# Altium PCB Simple Watch Development Board.PcbDoc (part 2 of 2)
Units mil, origin at the board's own origin, x right, y up, seen from the top; angles counter-clockwise.
Board outline 3937.01 x 2559.06 mil, 4 copper layers (Top Layer, Signal Layer 1, Ground Plane, Bottom Layer), stack 40.634 mil thick; 125 components, 93 nets, 403 pads, 128 vias.
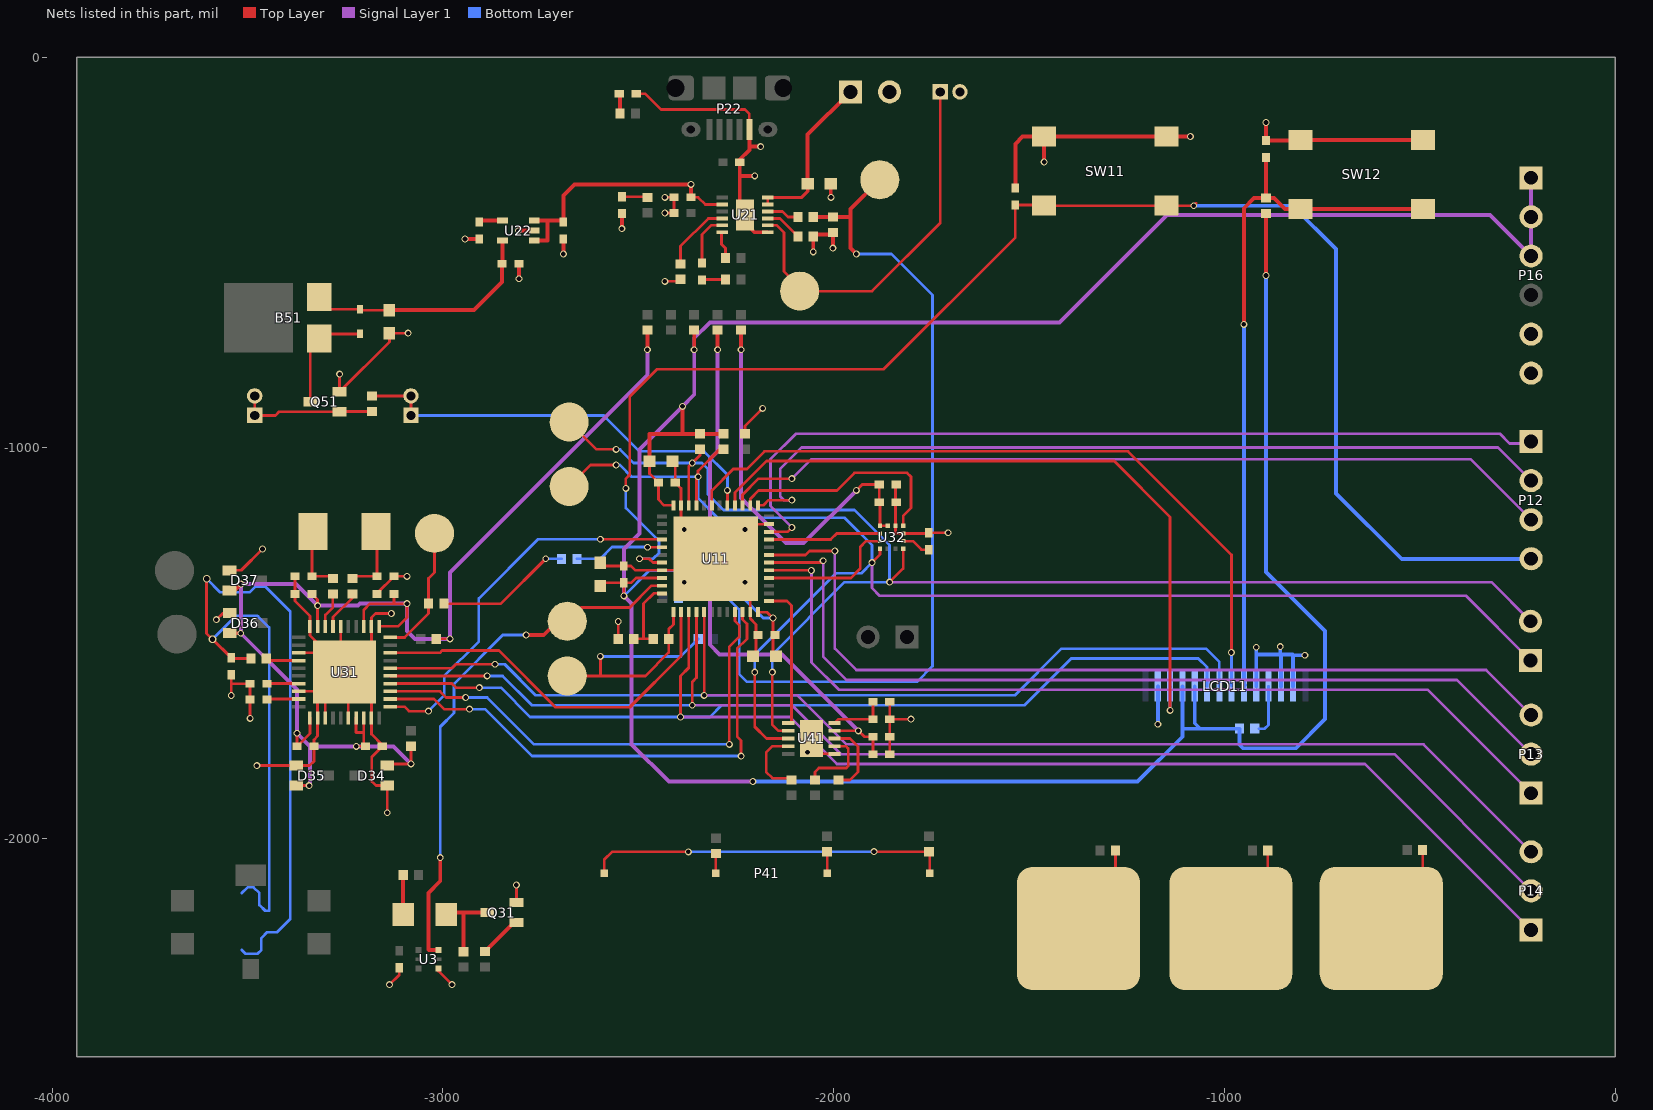
[diagram p4: the nets of this part, all layers, seen from the top]

## Via types
v1: diameter 17.72, hole 11.81, Top Layer to Bottom Layer, 122 vias
v2: diameter 196.85, hole 122.05, Top Layer to Bottom Layer, 4 vias
v3: diameter 19.68, hole 13.78, Top Layer to Bottom Layer, 2 vias

## Nets (pads, with @x,y where several pads share a name; then routed paths per layer and width w, separated by ;. In a path a pad name is that pad's centre, name@x,y a point inside that pad or via, vN(x,y) a via of type N, cw(c..) or ccw(c..) an arc to the next point about the centre after c; other vN are vias at no path point) (continued)
GND: C11.1 C12.1 C14.1 C15.1 C17.1 C18.1 C19.1 C20.2 C21.1 C22.1 C23.1 C24.1 C25.1 C26.1 C27.1 C31.1 C32.1 C33.1 C34.2 C35.1 C36.1 C37.1 C38.1 C39.1 C41.1 C42.1 C43.1 C44.1 C51.1 C310.1 C311.1 C312.1 C313.1 D24.2 D29.2 D34.1 D35.1 D36.1 D37.1 LCD11.2 LCD11.3 LCD11.5 LCD11.13 P16.5 P16.6 P21.2 P22.5 Q31.2 Q51.2 R14.1 R16.2 R21.1 R22.1 R26.2 RT21.2 SW11.3 SW11.4 SW12.1 SW12.2 U3.4 U11.8 U11.23 U11.35 U11.47 U11.49 U21.7 U21.13 U22.2 U31.3 U31.8 U31.12 U31.13 U31.16 U31.19 U31.32 U31.36 U31.40 U31.41 U32.6 U32.8 U41.1 U41.11 | length 7331.6
  Top Layer w7: v1(-3580,-1440) -3563.46,-1423.46 D36.1@-3545.75,-1423.46 ; D37.1@-3546.38,-1313.46 -3516.42,-1313.46 v1(-3462.01,-1259.06) ; v1(-3542.01,-1634.06) -3542.01,-1604.06 ; C39.1@-3542.01,-1580.71 -3542.01,-1604.06 ; v1(-3493.66,-1692.4) C37.1@-3493.66,-1644.06 C38.1@-3493.66,-1604.06 -3542.01,-1604.06 ; v1@-3477.01,-1814.06 v1(-3476.42,-1813.46) D35.1@-3375.75,-1813.46 -3341.42,-1813.46 -3330.35,-1802.4 C36.1@-3330.35,-1764.06 -3330.35,-1747.4 -3320.91,-1737.95 U31.12@-3320.91,-1691.18 -3320.91,-1642.95 U31.41@-3301.22,-1623.27 ; C34.2@-3378.66,-1329.06 C31.1@-3378.66,-1374.06 -3378.66,-1392.4 -3340.59,-1430.47 U31.40@-3340.59,-1456.93 -3340.59,-1480.47 U31.41@-3261.85,-1559.21 ; U31.8@-3369.13,-1623.27 U31.41@-3301.22,-1623.27 ; U31.3@-3369.13,-1524.84 -3301.22,-1524.84 -3261.85,-1564.21 U31.41@-3261.85,-1559.21 ; U31.13@-3301.22,-1691.18 U31.41@-3301.22,-1623.27 ; v1(-3264.61,-811.65) Q51.2@-3264.61,-856.61 -3137.01,-729.02 C51.1@-3137.01,-706.73 v1(-3089.33,-706.73) ; U31.36@-3261.85,-1456.93 U31.41@-3261.85,-1559.21 ; U31.16@-3242.17,-1691.18 U31.41@-3242.17,-1583.9 ; C32.1@-3168.66,-1374.06 -3168.66,-1372.36 C33.1@-3125.35,-1329.06 v1(-3092.01,-1329.06) ; v1(-3142.64,-1934.06) D34.1@-3142.64,-1864.65 -3171.42,-1864.65 -3182.01,-1854.06 -3182.01,-1790.71 C35.1@-3155.35,-1764.06 -3155.35,-1760.71 -3183.11,-1732.95 U31.19@-3183.11,-1691.18 -3183.11,-1642.95 U31.41@-3242.17,-1583.9 ; v1(-3137.01,-2374.06) -3112.01,-2349.06 C313.1@-3112.01,-2330.71 ; v1(-3132.01,-1424.06) -3172.92,-1424.06 -3183.11,-1434.25 U31.32@-3183.11,-1456.93 -3183.11,-1505.16 U31.41@-3252.01,-1574.06 ; U3.4@-3011.42,-2332.68 -3011.42,-2339.65 v1(-2977.01,-2374.06) ; Q31.2@-2812.01,-2164.06 v1(-2812.01,-2119.06) ; C18.1@-2597.01,-1294.53 -2589.13,-1302.4 C17.1@-2537.01,-1302.4 -2518.66,-1302.4 -2507.48,-1313.58 U11.8@-2438.82,-1313.58 -2331.54,-1313.58 U11.49@-2302.01,-1284.06 ; R14.1@-2551.38,-1489.06 v1(-2551.38,-1444.68) ; D29.2@-2505.35,-94.06 -2482.01,-94.06 -2442.01,-134.06 -2227.01,-134.06 -2215.83,-145.24 P22.5@-2215.83,-185.35 ; v1(-2432.01,-574.06) -2397.32,-574.06 R22.1@-2392.01,-568.74 ; v1(-2432.01,-399.06) C23.1@-2408.66,-399.06 C22.1@-2408.66,-359.06 v1(-2432.01,-359.06) ; C15.1@-2412.48,-1034.06 -2405.35,-1041.18 C12.1@-2405.35,-1089.06 -2390.59,-1103.82 U11.47@-2390.59,-1147.24 -2390.59,-1195.47 U11.49@-2302.01,-1284.06 ; R16.2@-2227.01,-964.37 -2227.01,-944.06 v1(-2182.01,-899.06) ; U11.23@-2213.43,-1420.87 -2213.43,-1372.64 U11.49@-2302.01,-1284.06 ; U11.23@-2212.01,-1429.06 -2213.43,-1427.64 -2213.43,-1437.64 -2198.66,-1452.4 -2198.66,-1526.18 C14.1@-2206.54,-1534.06 ; U11.35@-2165.2,-1195.47 -2213.43,-1195.47 v1(-2227.01,-1209.06) U11.49@-2302.01,-1284.06 ; U41.11@-2057.01,-1744.06 -2037.32,-1744.06 -2047.01,-1753.74 -2047.01,-1783.43 U41.1@-1997.95,-1783.43 ; C44.1@-1856.3,-1784.68 C43.1@-1856.3,-1739.68 C41.1@-1856.3,-1694.68 ; C42.1@-1856.3,-1649.68 C41.1@-1856.3,-1694.68 ; C311.1@-1840.04,-1094.06 -1841.85,-1095.87 U32.8@-1841.85,-1199.53 -1841.85,-1219.21 U32.6@-1822.17,-1219.21 -1758.5,-1219.21 C310.1@-1756.69,-1217.4 v1(-1707.01,-1217.4) v1@-1703.66,-1217.4 ; v1(-1802.01,-1694.68) C41.1@-1856.3,-1694.68 ; U31.41@-3301.22,-1623.27 U31.41@-3252.01,-1574.06 ; U31.41@-3261.85,-1559.21 -3252.01,-1569.06 U31.41@-3252.01,-1574.06 ; U31.41@-3252.01,-1574.06 U31.41@-3242.17,-1583.9
  Top Layer w10: v1(-2943.66,-465.71) C27.1@-2907.01,-465.71 C27.1@-2905.35,-464.06 ; v1(-2807.01,-444.06) U22.2@-2766.65,-444.06 ; v1(-2805.35,-567.4) C26.1@-2805.35,-529.06 ; v1(-2692.01,-504.06) C25.1@-2692.01,-465.71 ; v1(-2542.01,-439.06) D24.2@-2542.01,-400.71 ; P22.5@-2215.83,-185.35 -2215.83,-229.06 ; v1(-2202.01,-304.06) -2240.35,-304.06 ; v1(-2187.01,-229.06) -2215.83,-229.06 ; U21.7@-2168.94,-448.35 -2202.72,-448.35 -2227.01,-424.06 U21.13@-2227.01,-404.06 -2240.35,-390.71 -2240.35,-304.06 ; v1(-2052.32,-498.74) R21.1@-2052.32,-459.06 -2047.32,-454.06 -2007.32,-454.06 R26.2@-2002.01,-448.74 v1(-2002.01,-489.06) ; v1(-2007.01,-359.06) -2007.48,-358.58 C24.1@-2007.48,-324.06 C24.1@-2007.01,-324.53 ; C19.1@-1535,-335.24 -1535,-221.97 -1516.34,-203.31 SW11.4@-1461.5,-203.31 ; v1(-1461.5,-268.54) SW11.4@-1461.5,-203.31 ; v1@-1082.76,-203.31 v1(-1087.01,-203.31) SW11.3@-1148.5,-203.31 SW11.4@-1461.5,-203.31 ; v1(-893.5,-167.56) C20.2@-893.5,-213.82 -806.93,-213.82 SW12.1@-805,-211.89 SW12.2@-492.01,-211.89 ; -2240.35,-304.06 C21.1@-2240.35,-269.06 -2240.35,-262.4 -2215.83,-237.87 -2215.83,-229.06
  Bottom Layer w10: v1(-1170.47,-1707.52) LCD11.13@-1170.47,-1610.47 ; LCD11.5@-918.5,-1610.47 -918.5,-1530.55 ; v1(-918.5,-1510.55) -918.5,-1530.55 ; v1(-857.01,-1509.06) -857.01,-1529.06 ; LCD11.3@-855.51,-1610.47 -855.51,-1530.55 -857.01,-1529.06 ; LCD11.2@-824.02,-1610.47 -824.02,-1531.06 ; v1(-794.02,-1531.06) -824.02,-1531.06 ; -918.5,-1530.55 -917.01,-1529.06 -857.01,-1529.06 ; -857.01,-1529.06 -826.02,-1529.06 -824.02,-1531.06
  other v1: -2067.01,-1779.06 -2382.01,-1344.06 -2227.01,-1344.06 -2382.01,-1209.06
I2C1_SCL: P11.1 R19.2 TP14.1 U11.45 U32.1 U41.8 | length 3689.5
  Top Layer w7: TP14.1@-2677.01,-1099.06 -2622.01,-1044.06 v1(-2557.01,-1044.06) ; U11.45@-2351.22,-1147.24 -2351.22,-1078.27 v1(-2347.01,-1074.06) -2347.01,-1059.06 -2291.69,-1003.74 R19.2@-2282.01,-1003.74 ; v1(-2202.01,-1574.06) -2202.01,-1714.06 -2172.01,-1744.06 U41.8@-2116.06,-1744.06 ; v1(-1902.01,-1294.06) -1881.22,-1273.27 U32.1@-1881.22,-1258.58
  Signal Layer 1 w7: v1(-1902.01,-1294.06) -1902.01,-1359.06 -1882.32,-1378.74 -382.01,-1378.74 P11.1@-216.69,-1544.06
  Bottom Layer w7: v1(-2557.01,-1044.06) -2547.01,-1044.06 -2517.01,-1074.06 v1(-2347.01,-1074.06) -2347.01,-1129.06 -2297.01,-1179.06 -1972.01,-1179.06 -1902.01,-1249.06 v1(-1902.01,-1294.06) -1929.11,-1321.16 -1994.11,-1321.16 -2202.01,-1529.06 v1(-2202.01,-1574.06)
I2C1_SDA: P11.2 R110.2 TP13.1 U11.46 U32.4 U41.7 | length 3624.6
  Top Layer w7: TP13.1@-2677.01,-934.06 -2607.01,-1004.06 v1(-2557.01,-1004.06) ; U11.46@-2370.91,-1147.24 -2370.91,-1047.95 v1(-2362.01,-1039.06) -2342.01,-1019.06 R110.2@-2342.01,-1003.74 ; v1(-2157.01,-1574.06) -2157.01,-1709.06 -2141.69,-1724.37 U41.7@-2116.06,-1724.37 ; v1(-1857.01,-1344.06) -1822.17,-1309.21 U32.4@-1822.17,-1258.58
  Signal Layer 1 w7: v1(-1857.01,-1344.06) -316.69,-1344.06 P11.2@-216.69,-1444.06
  Bottom Layer w7: v1(-2557.01,-1004.06) -2547.01,-1004.06 -2512.01,-1039.06 v1(-2362.01,-1039.06) -2337.01,-1039.06 -2322.01,-1054.06 -2322.01,-1119.06 -2282.01,-1159.06 -1947.01,-1159.06 -1857.01,-1249.06 v1(-1857.01,-1344.06) -1972.01,-1344.06 -2157.01,-1529.06 v1(-2157.01,-1574.06)
INT1_ACC: U11.28 U32.12 | length 355.3
  Top Layer w7: U11.28@-2165.2,-1333.27 -1956.22,-1333.27 -1932.01,-1309.06 -1932.01,-1254.06 -1916.85,-1238.9 U32.12@-1881.22,-1238.9
INT2_ACC: U11.33 U32.11 | length 290.5
  Top Layer w7: U11.33@-2165.2,-1234.84 -2007.8,-1234.84 -1992.17,-1219.21 U32.11@-1881.22,-1219.21
LCD_CS: LCD11.12 U11.40 | length 1798.3
  Top Layer w7: U11.40@-2252.8,-1147.24 -2252.8,-1114.84 -2172.01,-1034.06 -1282.01,-1034.06 -1138.98,-1177.09 v1(-1138.98,-1672.09)
  Bottom Layer w7: v1(-1138.98,-1672.09) LCD11.12@-1138.98,-1610.47 LCD11.12@-1137.01,-1612.44
LCD_CTRL: LCD11.7 U11.43 | length 1855.9
  Top Layer w7: U11.43@-2311.85,-1147.24 -2311.85,-1108.9 -2257.01,-1054.06 -2222.01,-1054.06 -2177.01,-1009.06 -1247.01,-1009.06 -982.01,-1274.06 v1(-982.01,-1524.06)
  Bottom Layer w7: v1(-982.01,-1524.06) -982.01,-1609.96 LCD11.7@-981.5,-1610.47
LED_DRV_SUP: C31.2 C32.2 C35.2 C36.2 D34.2 D35.2 D36.2 D37.2 R36.2 R38.2 R212.2 U31.11 U31.17 U31.18 U31.31 U31.33 U31.39 | length 3408.6
  Top Layer w7: D35.2@-3375.75,-1864.65 v1(-3342.6,-1864.65) ; v1(-3373.66,-1730.71) C36.2@-3373.66,-1764.06 -3340.59,-1730.98 U31.11@-3340.59,-1691.18 ; C31.2@-3335.35,-1374.06 -3320.91,-1388.5 v1(-3320.91,-1404.06) U31.39@-3320.91,-1456.93 ; U31.17@-3222.48,-1691.18 -3222.48,-1728.58 -3202.8,-1728.58 U31.18@-3202.8,-1691.18 ; v1(-3222.01,-1764.06) C35.2@-3198.66,-1764.06 -3202.8,-1759.92 -3202.8,-1729.06 ; U31.33@-3202.8,-1456.93 -3202.8,-1414.84 -3187.01,-1399.06 -3125.35,-1399.06 ; U31.31@-3163.43,-1456.93 -3114.88,-1456.93 -3092.01,-1434.06 v1(-3092.01,-1399.06) -3125.35,-1399.06 ; D34.2@-3142.64,-1813.46 -3138.23,-1809.06 v1(-3082.01,-1809.06) R38.2@-3082.01,-1763.74 ; C32.2@-3125.35,-1374.06 -3125.35,-1399.06 ; R36.2@-3017.32,-1489.06 v1(-2982.01,-1489.06)
  Top Layer w10: D37.2@-3546.38,-1364.65 -3532.6,-1364.65 v1(-3517.01,-1349.06) ; D36.2@-3545.75,-1474.65 v1(-3517.6,-1474.65) ; v1(-2477.01,-749.06) R212.2@-2477.01,-698.74
  Signal Layer 1 w10: v1(-3342.6,-1864.65) -3340.32,-1862.36 -3340.32,-1764.06 ; v1(-3082.01,-1809.06) -3127.01,-1764.06 v1(-3222.01,-1764.06) -3340.32,-1764.06 ; v1(-2477.01,-749.06) -2477.01,-814.06 -2982.01,-1319.06 v1(-2982.01,-1489.06) -3072.01,-1489.06 -3092.01,-1469.06 v1(-3092.01,-1399.06) -3212.01,-1399.06 -3217.01,-1404.06 v1(-3320.91,-1404.06) -3375.91,-1349.06 v1(-3517.01,-1349.06) -3517.01,-1474.06 v1(-3517.6,-1474.65) -3373.66,-1618.58 v1(-3373.66,-1730.71) -3340.32,-1764.06
LSM303_SUP: C311.2 C312.2 R213.2 U32.9 U32.10 | length 1019.8
  Top Layer w7: v1(-1942.01,-1109.06) -1927.01,-1094.06 C311.2@-1883.35,-1094.06 C312.2@-1883.35,-1139.06 -1881.22,-1141.18 U32.10@-1881.22,-1199.53 U32.9@-1861.54,-1199.53
  Top Layer w10: v1(-2237.01,-749.06) R213.2@-2237.01,-698.74
  Signal Layer 1 w10: v1(-2237.01,-749.06) -2237.01,-1129.06 -2122.01,-1244.06 -2077.01,-1244.06 v1(-1942.01,-1109.06)
MCU_SUP: C11.2 C12.2 C14.2 C15.2 C17.2 C18.2 LCD11.10 LCD11.11 P16.1 P16.2 P16.3 R17.2 R18.2 R19.1 R110.1 R215.2 U11.9 U11.24 U11.48 | length 8511
  Top Layer w7: C18.2@-2597.01,-1353.58 -2589.13,-1345.71 C17.2@-2537.01,-1345.71 ; v1(-2537.01,-1379.06) C17.2@-2537.01,-1345.71 ; C15.2@-2471.54,-1034.06 -2471.54,-1066.18 C12.2@-2448.66,-1089.06 -2448.66,-1132.4 -2433.82,-1147.24 U11.48@-2410.28,-1147.24 ; U11.9@-2438.82,-1333.27 -2506.22,-1333.27 -2518.66,-1345.71 C17.2@-2537.01,-1345.71 ; U11.24@-2193.74,-1420.87 -2170.2,-1420.87 v1(-2155.35,-1435.71) -2155.35,-1531.93 C14.2@-2157.48,-1534.06
  Top Layer w10: C15.2@-2471.54,-1034.06 -2471.54,-964.37 -2387.01,-964.37 ; v1(-2387.01,-894.06) -2387.01,-964.37 ; v1(-2357.01,-749.06) R215.2@-2357.01,-698.74 ; R19.1@-2282.01,-964.37 R110.1@-2342.01,-964.37 -2387.01,-964.37 ; v1(-893.5,-559.06) R17.2@-893.5,-400.16
  Signal Layer 1 w10: v1(-2207.01,-1854.06) -2422.01,-1854.06 -2517.01,-1759.06 -2517.01,-1399.06 v1(-2537.01,-1379.06) -2537.01,-1259.06 -2497.01,-1219.06 -2497.01,-1004.06 v1(-2387.01,-894.06) -2357.01,-864.06 v1(-2357.01,-749.06) -2357.01,-719.06 -2317.01,-679.06 -1422.01,-679.06 -1147.01,-404.06 -320,-404.06 P16.3@-215,-509.06 P16.2@-215,-409.06 P16.1@-215,-309.06
  Bottom Layer w7: v1(-2537.01,-1379.06) -2472.01,-1314.06 -2302.01,-1314.06 -2180.35,-1435.71 v1(-2155.35,-1435.71)
  Bottom Layer w10: v1(-2207.01,-1854.06) -1222.01,-1854.06 -1107.48,-1739.53 -1107.48,-1719.06 ; LCD11.11@-1107.48,-1610.47 -1107.48,-1719.06 ; LCD11.10@-1075.98,-1610.47 -1075.98,-1705.08 -1062.01,-1719.06 ; v1(-893.5,-559.06) -893.5,-1317.56 -742.01,-1469.06 -742.01,-1694.06 -817.01,-1769.06 -952.01,-1769.06 -961.69,-1759.37 R18.2@-961.69,-1719.06 -1062.01,-1719.06 ; -1107.48,-1719.06 -1062.01,-1719.06
MOTOR: P52.1 P52.2 R51.2 U11.41 | length 1100.8
  Top Layer w7: R51.2@-3182.01,-867.52 -3082.32,-867.52 -3082.01,-867.83 P52.1@-3082.01,-917.2 ; U11.41@-2272.48,-1147.24 -2272.01,-1146.77 v1(-2272.01,-1109.06)
  Bottom Layer w7: P52.1@-3082.01,-917.2 -2588.86,-917.2 -2497.01,-1009.06 -2332.01,-1009.06 -2272.01,-1069.06 v1(-2272.01,-1109.06)
MOTOR_GATE: P51.1 P51.2 Q51.1 R51.1 | length 354.3
  Top Layer w7: P51.2@-3482.01,-867.2 P51.1@-3482.01,-917.2 -3428.86,-917.2 -3419.45,-907.8 Q51.1@-3264.61,-907.8 -3263.7,-906.89 R51.1@-3182.01,-906.89
MOTOR_SUP: B51.1 C26.2 C51.2 D51.2 U22.5 | length 618.7
  Top Layer w7: B51.1@-3317.01,-614.06 -3285.35,-645.71 D51.2@-3212.01,-645.71 -3210.04,-647.68 C51.2@-3137.01,-647.68
  Top Layer w10: C51.2@-3137.01,-647.68 -2920.63,-647.68 -2848.66,-575.71 C26.2@-2848.66,-529.06 -2847.36,-527.76 U22.5@-2847.36,-469.65
NetB51_2: B51.2 D51.1 Q51.3 | length 281
  Top Layer w7: Q51.3@-3339.41,-882.2 -3339.41,-742.76 B51.2@-3317.01,-720.35 -3305.35,-708.7 D51.1@-3212.01,-708.7
NetC20_1: C20.1 LCD11.6 R17.1 SW12.3 SW12.4 | length 1811.9
  Top Layer w10: v1(-950,-684.06) -950,-387.05 -923.74,-360.79 R17.1@-893.5,-360.79 ; C20.1@-893.5,-257.13 R17.1@-893.5,-360.79 ; SW12.4@-492.01,-389.06 SW12.3@-805,-389.06 -844.92,-389.06 -873.19,-360.79 R17.1@-893.5,-360.79
  Bottom Layer w10: v1(-950,-684.06) LCD11.6@-950,-1610.47 LCD11.6@-947.01,-1607.48
NetC24_2: C24.2 P21.1 U21.11 U21.12 | length 426.7
  Top Layer w7: U21.11@-2168.94,-377.48 U21.12@-2168.94,-359.76
  Top Layer w8: U21.12@-2168.94,-359.76 -2082.72,-359.76 -2066.54,-343.58 C24.2@-2066.54,-324.06
  Top Layer w10: C24.2@-2066.54,-324.06 -2066.54,-198.58 P21.1@-1957.01,-89.06
NetC27_2: C27.2 U22.4 | length 61.3
  Top Layer w10: C27.2@-2907.01,-422.4 -2903.07,-418.46 U22.4@-2847.36,-418.46
NetC33_2: C33.2 R35.2 Y1.2 | length 181.8
  Top Layer w7: R35.2@-3232.01,-1334.68 -3226.38,-1329.06 C33.2@-3168.66,-1329.06 -3168.66,-1216.69 Y1.2@-3171.3,-1214.06
NetC34_1: C34.1 R34.2 Y1.1 | length 171.8
  Top Layer w7: Y1.1@-3332.72,-1214.06 -3335.35,-1216.69 C34.1@-3335.35,-1329.06 -3287.64,-1329.06 R34.2@-3282.01,-1334.68
NetC37_2: C37.2 U31.9 | length 81.7
  Top Layer w7: C37.2@-3450.35,-1644.06 -3449.25,-1642.95 U31.9@-3369.13,-1642.95
NetC38_2: C38.2 U31.7 | length 81.4
  Top Layer w7: C38.2@-3450.35,-1604.06 -3449.88,-1603.58 U31.7@-3369.13,-1603.58
NetC39_2: C39.2 R31.1 | length 2536.5
  Top Layer w7: v3(-3605,-1335) -3605,-1475 v3(-3590,-1490) -3589.41,-1490 C39.2@-3542.01,-1537.4 -3540.35,-1539.06 R31.1@-3491.69,-1539.06
  Bottom Layer w7: v3(-3605,-1335) -3570,-1370 -3495,-1370 -3480,-1355 -3455,-1355 -3391.02,-1418.98 -3391.02,-2206.02 -3425,-2240 -3450,-2240 -3465,-2255 -3465,-2285 -3475,-2295 -3505,-2295 -3515,-2285 ; v3(-3590,-1490) -3530,-1430 -3475.61,-1430 -3474.2,-1431.41 -3473.59,-1431.41 -3445,-1460 -3445,-2185 -3455,-2185 -3470,-2170 -3470,-2140 -3485,-2125 -3500,-2125 -3515,-2140
NetC41_2: C41.2 C42.2 U41.5 | length 147.5
  Top Layer w7: U41.5@-1997.95,-1704.68 -1987.95,-1694.68 C41.2@-1899.61,-1694.68 C42.2@-1899.61,-1649.68
NetC310_2: C310.2 U32.5 | length 74.5
  Top Layer w7: U32.5@-1822.17,-1238.9 -1797.17,-1238.9 -1775.35,-1260.71 C310.2@-1756.69,-1260.71
NetD21_1: D21.1 R24.2 | length 61
  Top Layer w7: D21.1@-2337.01,-570.71 -2335.35,-569.06 R24.2@-2276.69,-569.06
NetD21_2: D21.2 U21.5 | length 135
  Top Layer w7: D21.2@-2337.01,-527.4 -2337.01,-454.06 -2313.58,-430.63 U21.5@-2285.08,-430.63
NetD24_1: D24.1 R29.2 | length 65.8
  Top Layer w7: D24.1@-2542.01,-357.4 -2478.98,-357.4 R29.2@-2477.01,-359.37
NetD29_1: D29.1 R210.2 | length 50.8
  Top Layer w10: D29.1@-2548.66,-94.06 -2546.69,-96.02 R210.2@-2546.69,-144.06
NetD38_1: D38.1 R39.1 | length 100.2
  Top Layer w10: D38.1@-3102.13,-2194.06 -3102.13,-2094.49 R39.1@-3101.69,-2094.06
NetD38_2: D38.2 Q31.3 R311.2 | length 206.9
  Top Layer w10: D38.2@-2991.89,-2194.06 -2987.48,-2189.65 -2947.01,-2189.65 ; R311.2@-2947.01,-2289.68 -2947.01,-2189.65 ; Q31.3@-2886.81,-2189.65 -2947.01,-2189.65
NetLCD11_4: LCD11.4 R18.1 | length 128
  Bottom Layer w7: R18.1@-912.32,-1719.06 -897.01,-1719.06 -887.01,-1709.06 LCD11.4@-887.01,-1610.47
NetP41_1: P41.1 R45.2 | length 930.3
  Top Layer w7: P41.1@-2587.44,-2089.06 -2587.44,-2054.49 -2567.01,-2034.06 v1(-2372.01,-2034.06) ; v1(-1896.69,-2033.74) R45.2@-1756.58,-2033.74 -1754.27,-2036.05 P41.1@-1754.27,-2089.06
  Bottom Layer w7: v1(-2372.01,-2034.06) -2371.69,-2033.74 v1(-1896.69,-2033.74)
NetP41_2: P41.2 R46.2 | length 50.5
  Top Layer w7: P41.2@-2302.01,-2089.06 -2302.01,-2039.17 R46.2@-2301.58,-2038.74
NetP41_3: P41.3 R47.2 | length 55.3
  Top Layer w7: P41.3@-2016.58,-2089.06 R47.2@-2016.58,-2033.74
NetP42_1: P42.1 R48.2 | length 245.3
  Top Layer w7: P42.1@-598.5,-2230.47 -492.64,-2124.61 R48.2@-492.64,-2029.06
NetP43_1: P43.1 R49.2 | length 239.5
  Top Layer w7: P43.1@-983.5,-2230.47 -888.82,-2135.79 R49.2@-888.82,-2030.16
NetP44_1: P44.1 R50.2 | length 239.5
  Top Layer w7: P44.1@-1373.5,-2230.47 -1278.82,-2135.79 R50.2@-1278.82,-2030.16
NetQ31_1: Q31.1 R310.2 | length 110.7
  Top Layer w10: R310.2@-2892.01,-2289.37 -2817.87,-2215.24 Q31.1@-2812.01,-2215.24
NetR11_1: R11.1 R37.1 | length 348.6
  Top Layer w7: R37.1@-2997.64,-1399.06 -2852.01,-1399.06 v1(-2737.01,-1284.06)
  Bottom Layer w7: v1(-2737.01,-1284.06) R11.1@-2696.69,-1284.06
NetR11_2: R11.2 U11.5 | length 231.1
  Top Layer w7: v1(-2476.54,-1254.53) U11.5@-2438.82,-1254.53
  Bottom Layer w7: R11.2@-2657.32,-1284.06 -2597.01,-1284.06 -2567.01,-1254.06 -2477.01,-1254.06 v1(-2476.54,-1254.53)
NetR12_1: R12.1 R25.2 R26.1 TP21.1 | length 2363.8
  Top Layer w10: R25.2@-2052.32,-409.06 -2052.01,-409.37 R26.1@-2002.01,-409.37 -1957.01,-409.37 ; v1(-1942.01,-504.06) -1957.01,-489.06 -1957.01,-409.37 ; TP21.1@-1882.01,-314.06 -1957.01,-389.06 -1957.01,-409.37
  Bottom Layer w7: R12.1@-2397.32,-1384.06 -2272.01,-1384.06 -2242.01,-1414.06 -2242.01,-1579.06 -2222.01,-1599.06 -1787.01,-1599.06 -1747.01,-1559.06 -1747.01,-609.06 -1852.01,-504.06 v1(-1942.01,-504.06)
NetR21_2: R21.2 U21.9 | length 96.4
  Top Layer w7: U21.9@-2168.94,-412.91 -2137.83,-412.91 R21.2@-2091.69,-459.06
NetR22_2: R22.2 U21.4 | length 181.7
  Top Layer w7: R22.2@-2392.01,-529.37 -2392.01,-484.06 -2320.87,-412.91 U21.4@-2285.08,-412.91
NetR23_2: R23.2 U21.6 | length 70.8
  Top Layer w7: U21.6@-2285.08,-448.35 -2287.01,-450.28 -2287.01,-479.06 -2276.69,-489.37 R23.2@-2276.69,-514.06
NetR25_1: R25.1 U21.10 | length 83
  Top Layer w7: U21.10@-2168.94,-395.2 -2130.87,-395.2 -2117.01,-409.06 R25.1@-2091.69,-409.06
NetR31_2: R31.2 U31.4 | length 85.5
  Top Layer w7: R31.2@-3452.32,-1539.06 -3446.85,-1544.53 U31.4@-3369.13,-1544.53
NetR34_1: R34.1 U31.38 | length 90.8
  Top Layer w7: U31.38@-3301.22,-1456.93 -3301.22,-1428.27 -3282.01,-1409.06 R34.1@-3282.01,-1374.06
NetR35_1: R35.1 U31.37 | length 103.4
  Top Layer w7: U31.37@-3281.54,-1456.93 -3281.54,-1433.58 -3232.01,-1384.06 R35.1@-3232.01,-1374.06
NetR37_2: R37.2 TP35.1 U31.30 | length 334.7
  Top Layer w7: U31.30@-3134.88,-1485.47 -3098.11,-1485.47 -3037.01,-1424.37 R37.2@-3037.01,-1399.06 -3037.01,-1334.06 -3022.01,-1319.06 TP35.1@-3022.01,-1219.06
NetR41_1: R41.1 U41.9 | length 184.2
  Top Layer w7: U41.9@-2116.06,-1763.74 -2157.01,-1763.74 -2172.95,-1779.68 -2172.95,-1829.68 -2157.01,-1845.63 R41.1@-2108.9,-1845.63
NetR42_1: R42.1 U41.3 | length 192
  Top Layer w7: U41.3@-1997.95,-1744.06 -1958.58,-1744.06 -1937.95,-1764.68 -1937.95,-1829.68 -1958.27,-1850 R42.1@-1987.95,-1850
NetR43_1: R43.1 U41.2 | length 194
  Top Layer w7: R43.1@-2047.95,-1850 -2047.95,-1829.68 -2037.95,-1819.68 -1967.95,-1819.68 -1962.95,-1814.68 -1962.95,-1769.68 -1968.9,-1763.74 U41.2@-1997.95,-1763.74
NetRT21_1: RT21.1 TP22.1 U21.8 | length 983.6
  Top Layer w7: U21.8@-2168.94,-430.63 -2145.43,-430.63 -2127.01,-449.06 -2127.01,-549.06 -2112.01,-564.06 -2112.01,-574.06 TP22.1@-2087.01,-599.06 -1902.01,-599.06 -1727.01,-424.06 RT21.1@-1727.01,-89.06
NetU11_4: U11.4 U31.21 | length 977.1
  Top Layer w7: U31.21@-3134.88,-1662.64 -3098.43,-1662.64 -3087.01,-1674.06 v1(-3037.01,-1674.06) ; v1(-2597.01,-1234.06) -2439.61,-1234.06 U11.4@-2438.82,-1234.84
  Bottom Layer w7: v1(-3037.01,-1674.06) -2997.01,-1634.06 -2997.01,-1584.06 -2908.26,-1495.31 -2908.26,-1385.31 -2757.01,-1234.06 v1(-2597.01,-1234.06)
NetU11_14: U11.14 U31.28 | length 973
  Top Layer w7: U31.28@-3134.88,-1524.84 -3007.8,-1524.84 -3002.01,-1519.06 -2857.01,-1519.06 -2712.01,-1664.06 -2522.01,-1664.06 -2390.59,-1532.64 U11.14@-2390.59,-1420.87
NetU11_21: U11.21 U31.23 | length 1277.1
  Top Layer w7: U31.23@-3134.88,-1623.27 -3007.8,-1623.27 -2992.01,-1639.06 v1(-2942.01,-1639.06) ; v1(-2267.01,-1759.06) -2267.01,-1509.06 -2242.01,-1484.06 -2242.01,-1454.06 -2252.8,-1443.27 U11.21@-2252.8,-1420.87
  Bottom Layer w7: v1(-2942.01,-1639.06) -2887.01,-1639.06 -2767.01,-1759.06 v1(-2267.01,-1759.06)
NetU11_22: U11.22 U31.22 | length 1345.7
  Top Layer w7: U31.22@-3134.88,-1642.95 -3023.11,-1642.95 -2997.01,-1669.06 v1(-2932.01,-1669.06) ; v1(-2237.01,-1789.06) -2237.01,-1749.06 -2247.01,-1739.06 -2247.01,-1514.06 -2222.01,-1489.06 -2222.01,-1450.54 -2233.11,-1439.44 U11.22@-2233.11,-1420.87
  Bottom Layer w7: v1(-2932.01,-1669.06) -2892.01,-1669.06 -2772.01,-1789.06 v1(-2237.01,-1789.06)
NetU11_38: U11.38 U32.7 | length 593.7
  Top Layer w7: U11.38@-2213.43,-1147.24 -2213.43,-1130.47 -2192.01,-1109.06 -1992.01,-1109.06 -1947.01,-1064.06 -1812.01,-1064.06 -1802.01,-1074.06 -1802.01,-1154.06 -1822.17,-1174.21 U32.7@-1822.17,-1199.53
NRST: C19.2 P12.4 SW11.1 SW11.2 U11.7 | length 3874.6
  Top Layer w7: v1(-2532.01,-1104.06) -2532.01,-1079.06 -2522.01,-1069.06 -2522.01,-869.06 -2452.01,-799.06 -1872.01,-799.06 -1535,-462.05 C19.2@-1535,-378.54 -1463.43,-378.54 SW11.2@-1461.5,-380.47 SW11.1@-1148.5,-380.47 v1(-1078.43,-380.47) -1072.01,-374.06 ; v1(-2497.01,-1284.06) -2472.01,-1284.06 -2462.17,-1293.9 U11.7@-2438.82,-1293.9
  Bottom Layer w7: v1(-2532.01,-1104.06) -2532.01,-1154.06 -2447.01,-1239.06 -2447.01,-1269.06 -2462.01,-1284.06 v1(-2497.01,-1284.06)
  Bottom Layer w10: v1(-1078.43,-380.47) -825.59,-380.47 -714.51,-491.56 -714.51,-1116.56 -546.06,-1285 -237.64,-1285 P12.4@-216.69,-1264.06
OPAMP1_VINM: R13.1 R14.2 U11.11 | length 199.4
  Top Layer w7: R14.2@-2512.01,-1489.06 -2486.85,-1489.06 ; R13.1@-2461.69,-1489.06 -2486.85,-1489.06 ; U11.11@-2438.82,-1372.64 -2460.59,-1372.64 -2486.85,-1398.9 -2486.85,-1489.06
OPAMP1_VINP: TP37.1 U3.6 U11.10 | length 1370.3
  Top Layer w7: TP37.1@-2682.01,-1444.06 -2647.01,-1409.06 -2522.01,-1409.06 -2465.91,-1352.95 U11.10@-2438.82,-1352.95
  Top Layer w10: U3.6@-3011.42,-2285.43 -3035.63,-2285.43 -3037.01,-2284.06 -3037.01,-2139.06 -3007.01,-2109.06 v1(-3007.01,-2049.06) ; v1(-2787.01,-1479.06) -2742.01,-1479.06 -2707.01,-1444.06 TP37.1@-2682.01,-1444.06
  Bottom Layer w7: v1(-3007.01,-2049.06) -3007.01,-1714.06 -2972.01,-1679.06 -2972.01,-1604.06 -2847.01,-1479.06 v1(-2787.01,-1479.06)
OPAMP1_VOUT: R13.2 R15.2 TP11.1 U11.13 | length 716.9
  Top Layer w7: TP11.1@-2682.01,-1584.06 -2597.01,-1584.06 ; v1(-2597.01,-1534.06) -2597.01,-1584.06 ; U11.13@-2410.28,-1420.87 -2410.28,-1452.32 -2422.32,-1464.37 R13.2@-2422.32,-1489.06 -2422.32,-1524.37 -2482.01,-1584.06 -2597.01,-1584.06
  Bottom Layer w7: v1@-2602.01,-1534.06 v1(-2597.01,-1534.06) -2391.69,-1534.06 R15.2@-2346.69,-1489.06
SPI1_MISO: P14.2 U11.16 U31.25 | length 3390.6
  Top Layer w7: U31.25@-3134.72,-1584.06 U31.25@-3134.88,-1583.9 v1(-2887.17,-1583.9) ; v1(-2362.01,-1659.06) -2362.01,-1599.06 -2351.22,-1588.27 U11.16@-2351.22,-1420.87
  Signal Layer 1 w7: v1(-2362.01,-1659.06) -2107.01,-1659.06 -1982.01,-1784.06 -565,-1784.06 P14.2@-215,-2134.06
  Bottom Layer w7: v1(-2887.17,-1583.9) -2847.17,-1583.9 -2772.01,-1659.06 v1(-2362.01,-1659.06)
SPI1_MOSI: LCD11.8 P14.3 U11.17 U31.26 | length 4780.2
  Top Layer w7: U31.26@-3134.88,-1564.21 -2977.17,-1564.21 -2967.01,-1554.06 v1(-2867.01,-1554.06) ; v1(-2331.54,-1633.58) U11.17@-2331.54,-1420.87
  Signal Layer 1 w7: v1(-2331.54,-1633.58) -2092.48,-1633.58 -1967.01,-1759.06 -490,-1759.06 P14.3@-215,-2034.06
  Bottom Layer w7: v1(-2867.01,-1554.06) -2842.01,-1554.06 -2762.48,-1633.58 v1(-2331.54,-1633.58) -1536.54,-1633.58 -1417.01,-1514.06 -1047.01,-1514.06 -1012.99,-1548.07 LCD11.8@-1012.99,-1610.47
SPI1_SCK: LCD11.9 P14.1 U11.15 U31.24 | length 4925.8
  Top Layer w7: U31.24@-3134.88,-1603.58 -2977.48,-1603.58 -2967.01,-1614.06 v1(-2907.01,-1614.06) ; v1(-2392.01,-1689.06) -2392.01,-1584.06 -2370.91,-1562.95 U11.15@-2370.91,-1420.87
  Signal Layer 1 w7: v1(-2392.01,-1689.06) -2112.01,-1689.06 -1992.01,-1809.06 -640,-1809.06 P14.1@-215,-2234.06
  Bottom Layer w7: v1(-2907.01,-1614.06) -2852.01,-1614.06 -2777.01,-1689.06 v1(-2392.01,-1689.06) -2317.01,-1689.06 -2287.01,-1659.06 -1512.01,-1659.06 -1392.01,-1539.06 -1067.01,-1539.06 -1044.49,-1561.57 LCD11.9@-1044.49,-1610.47
SWCLK: P12.2 U11.37 | length 2176.3
  Top Layer w7: U11.37@-2193.74,-1147.24 -2180.2,-1147.24 -2167.01,-1134.06 v1(-2107.01,-1134.06)
  Signal Layer 1 w7: v1(-2107.01,-1134.06) -2127.01,-1134.06 -2137.01,-1124.06 -2137.01,-1054.06 -2082.01,-999.06 -300,-999.06 P12.2@-215,-1084.06
SWDIO: P12.1 U11.34 | length 2246.9
  Top Layer w7: U11.34@-2165.2,-1215.16 -2118.11,-1215.16 v1(-2107.01,-1204.06)
  Signal Layer 1 w7: v1(-2107.01,-1204.06) -2162.01,-1149.06 -2162.01,-1029.06 -2097.01,-964.06 -295,-964.06 -270,-989.06 -220,-989.06 P12.1@-215,-984.06
SWO: P12.3 U11.39 | length 2147.5
  Top Layer w7: U11.39@-2233.11,-1147.24 -2233.11,-1120.16 -2192.01,-1079.06 v1(-2107.01,-1079.06)
  Signal Layer 1 w7: v1(-2107.01,-1079.06) -2057.01,-1029.06 -370,-1029.06 P12.3@-215,-1184.06 ; P12.3@-217.01,-1164.06 P12.3@-216.69,-1164.06
SYS: C22.2 C25.2 U21.2 U22.1 U22.3 | length 690.3
  Top Layer w7: C22.2@-2365.35,-359.06 -2347.01,-359.06 -2328.58,-377.48 U21.2@-2285.08,-377.48
  Top Layer w10: U22.1@-2766.65,-469.65 -2732.01,-469.65 -2732.6,-469.06 -2732.6,-418.46 ; U22.3@-2766.65,-418.46 -2732.6,-418.46 ; C22.2@-2365.35,-359.06 v1(-2365.35,-325.71) -2663.66,-325.71 -2692.01,-354.06 C25.2@-2692.01,-422.4 -2695.94,-418.46 -2732.6,-418.46
TOUCH_RDY: U11.25 U41.6 | length 370.3
  Top Layer w7: U11.25@-2165.2,-1392.32 -2119.96,-1392.32 -2108.23,-1404.06 -2108.23,-1704.68 U41.6@-2116.06,-1704.68
TSC_SUP: C43.2 C44.2 R211.2 U41.4 | length 1434.9
  Top Layer w7: U41.4@-1997.95,-1724.37 v1(-1936.69,-1724.37) -1921.38,-1739.68 C43.2@-1899.61,-1739.68 C44.2@-1899.61,-1784.68
  Top Layer w10: v1(-2297.01,-749.06) R211.2@-2297.01,-698.74
  Signal Layer 1 w10: v1(-2297.01,-749.06) -2297.01,-1009.06 -2317.01,-1029.06 -2317.01,-1504.06 -2292.01,-1529.06 -2132.01,-1529.06 v1(-1936.69,-1724.37)
USART1_CLK: P13.1 U11.29 | length 2324.2
  Top Layer w7: U11.29@-2165.2,-1313.58 -2057.48,-1313.58 v1(-2057.01,-1314.06)
  Signal Layer 1 w7: v1(-2057.01,-1314.06) -2057.01,-1549.06 -1987.01,-1619.06 -480,-1619.06 P13.1@-215,-1884.06
USART1_RX: P13.3 U11.31 | length 2274.8
  Top Layer w7: U11.31@-2165.2,-1274.21 -2072.17,-1274.21 -2062.01,-1264.06 v1(-1997.01,-1264.06)
  Signal Layer 1 w7: v1(-1997.01,-1264.06) -1997.01,-1514.06 -1942.01,-1569.06 -330,-1569.06 P13.3@-215,-1684.06
USART1_TX: P13.2 U11.30 | length 2300.8
  Top Layer w7: U11.30@-2165.2,-1293.9 -2031.85,-1293.9 v1(-2027.01,-1289.06)
  Signal Layer 1 w7: v1(-2027.01,-1289.06) -2027.01,-1534.06 -1967.01,-1594.06 -405,-1594.06 P13.2@-215,-1784.06
pads on no net: B51. LCD11.1 LCD11.14 P22. P22.2 P22.3 P22.4 U3.2 U3.3 U3.5 U11.1 U11.6 U11.32 U11.36 U11.42 U31.5 U31.6 U31.10 U31.34 U31.35 U41.10
copper on no net:
  other v2: -3807.09,-2429.13 -129.92,-2429.13 -3807.09,-129.92 -129.92,-129.92

## Polygon pours and split planes (outlines as drawn)
GND on Ground Plane (split plane): -20.1,-2538.96 -3916.91,-2538.96 -3916.91,-20.1 -20.1,-20.1

## Silkscreen, mask and mechanical layers (free items; w line width, h text height)
Top Overlay:
  text "MCU RST" at -1430,-125 h40
  text "LCD RST" at -773.5,-133.58 h40
  text "Simple Watch" at -3635,-185 h170
  text "Battery Input" at -2010,-210 h40
  text "Development Board V1.0" at -3635,-275 h110
  text "3V3" at -155,-330 h40
  text "by Boning Dong 24/8/2018" at -3635,-355 h70
  text "powerd by UCSB IEEE" at -3635,-430 h70
  text "3V3" at -155,-430 h40
  text "3V3" at -155,-530 h40
  text "BOOT" at -155,-630 h40
  text "GND" at -155,-730 h40
  text "GND" at -155,-830 h40
  text "DIO" at -155,-1005 h40
  text "CLK" at -155,-1105 h40
  text "SWO" at -155,-1205 h40
  text "NRST" at -155,-1305 h40
  text "SDA" at -156.69,-1465 h40
  text "SCL" at -156.69,-1565 h40
  text "RX" at -155,-1705 h40
  text "TX" at -155,-1805 h40
  text "CLK" at -155,-1905 h40
  text "MOSI" at -155,-2055 h40
  text "MISO" at -155,-2155 h40
  text "CLK" at -155,-2255 h40
  text "AFF4400" at -3630,-2495 h40
  text "APDS9008" at -3185,-2495 h40
  text "Touch Slider" at -2370,-2495 h40
  text "Touch Button" at -1225,-2495 h40
Mechanical 1:
  the board outline again, w3.94